# Allegro board Balang_Ctrl_V1_0_20190623.brd
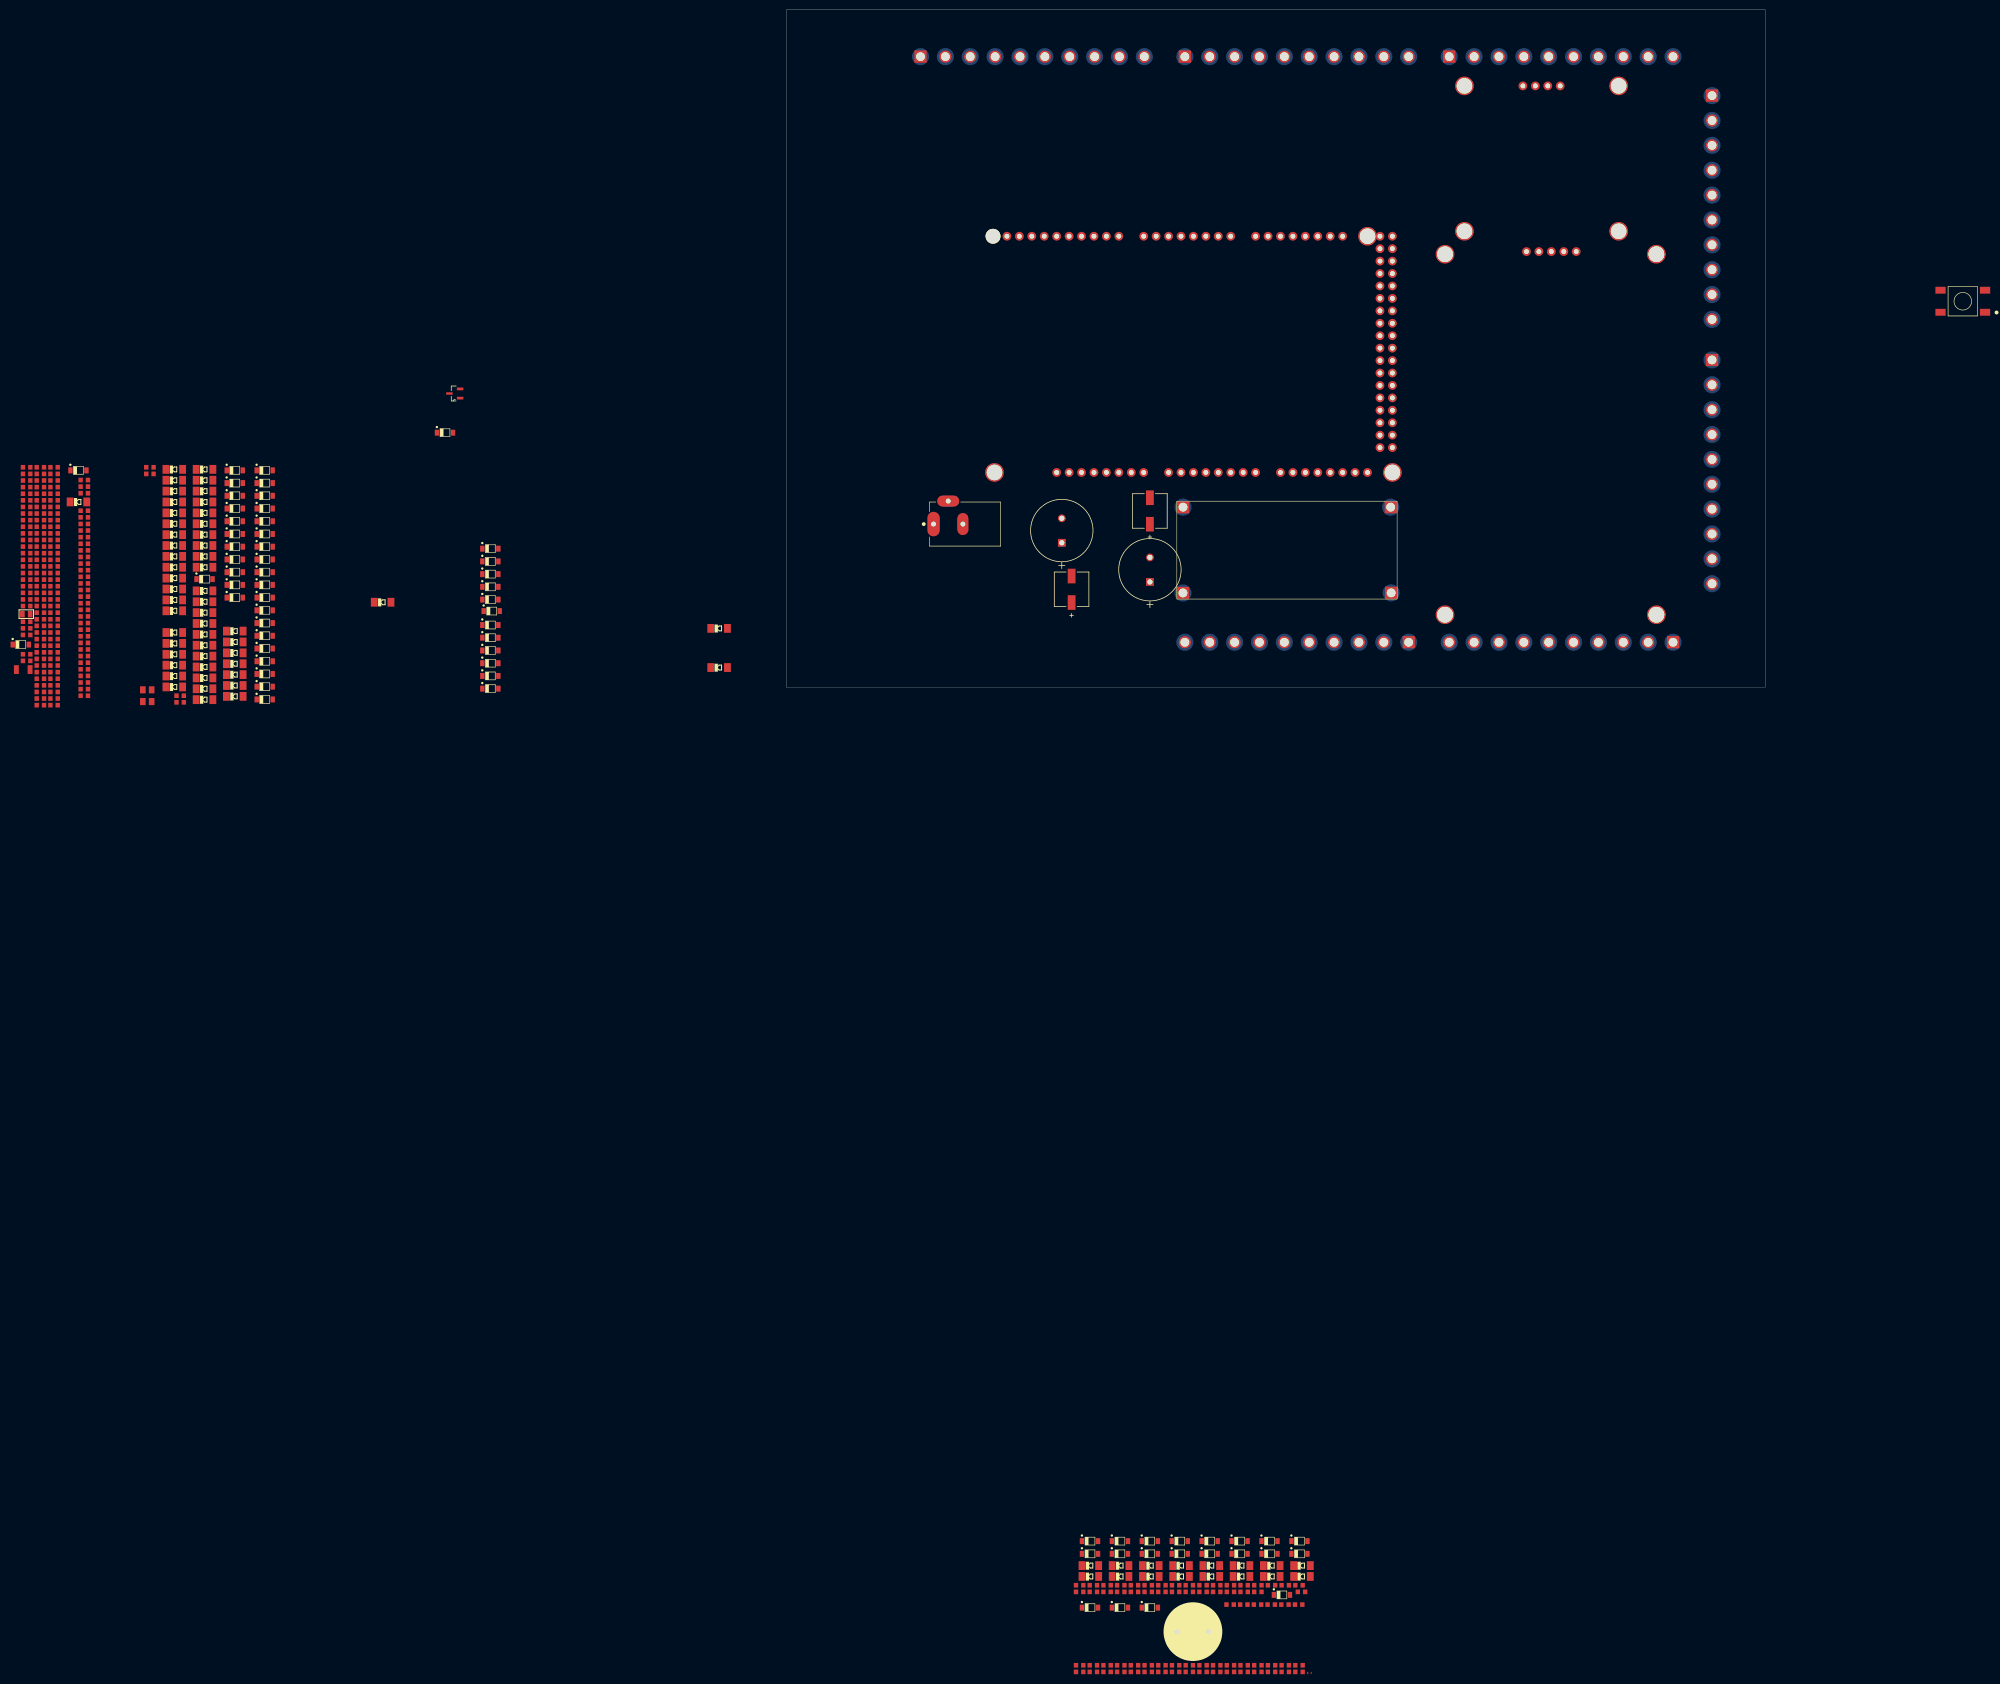
[diagram p0: board, top side]
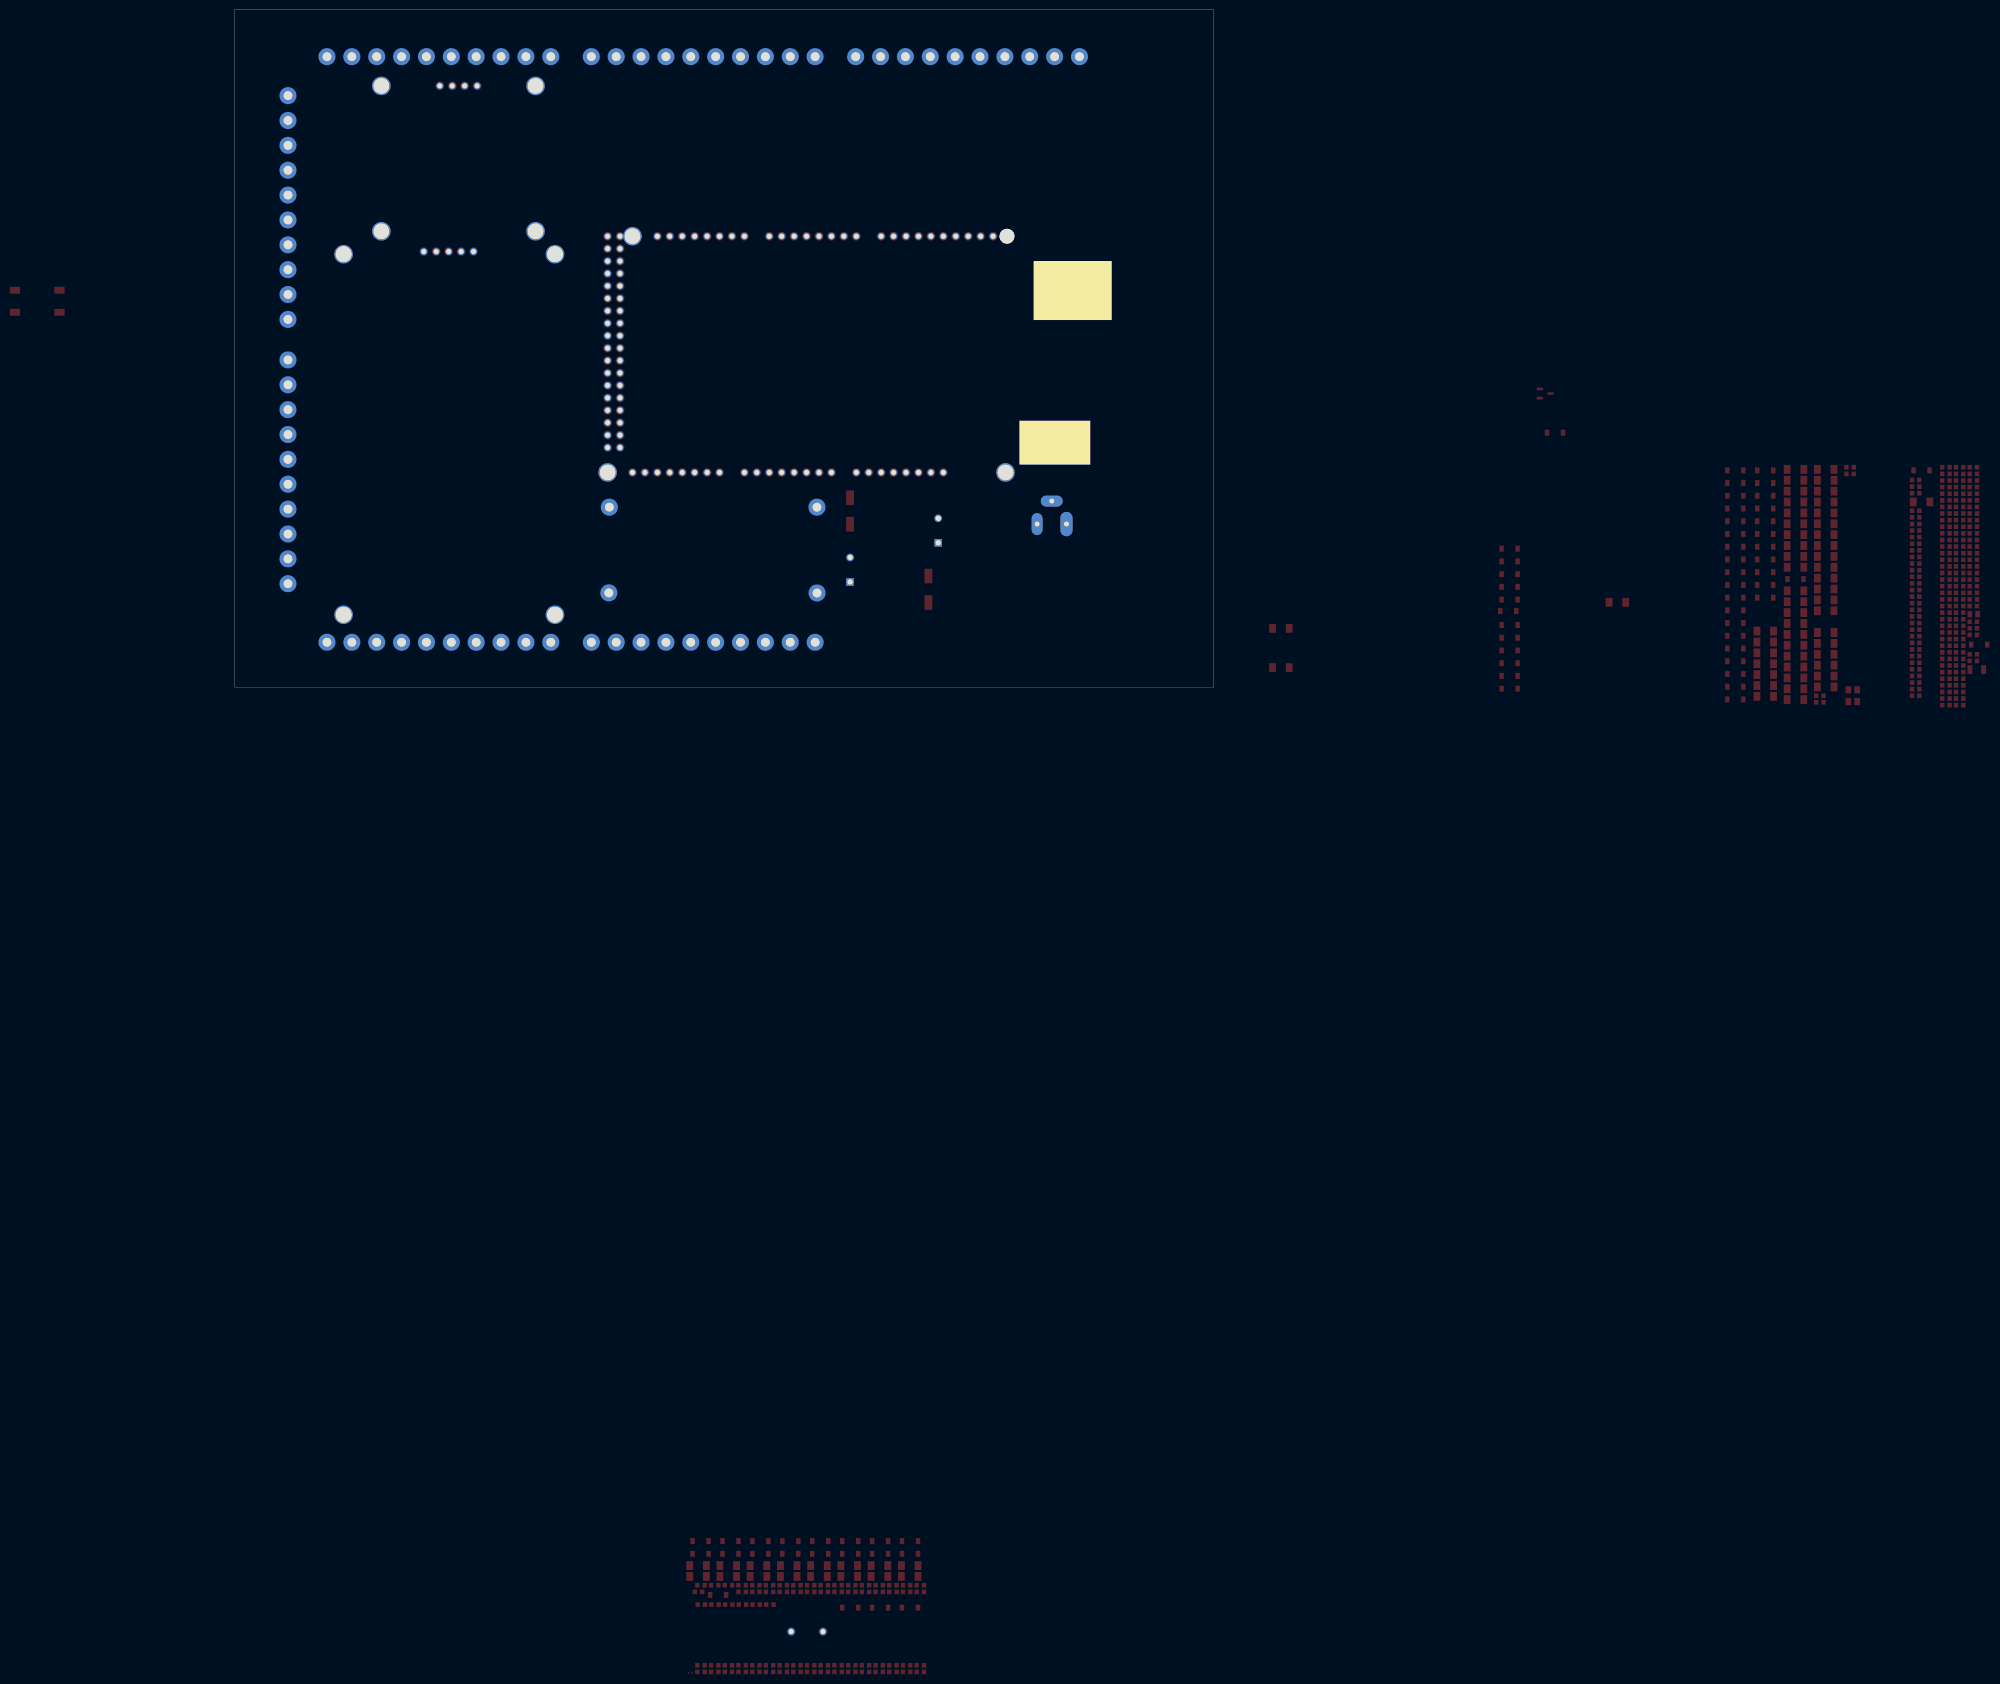
[diagram p1: board, bottom side, seen from below]

Outline 200 x 138.4 mm; copper layers: TOP, BOTTOM. Coordinates in mm from the lower left corner of the outline.
Outline path: 0,138.4 0,0 200,0 200,138.4 0,138.4

## Placement (name value [footprint] x y rotation side)
C1  100n  [CC0603]  -123.79 -1.74 0 top
C2  100n  [CC0603]  90.75 -183.49 0 top
C3  100n  [CC0603]  93.55 -183.49 0 top
C4  100n  [CC0603]  96.35 -183.49 0 top
C5  100n  [CC0603]  99.15 -183.49 0 top
C6  100n  [CC0603]  101.95 -183.49 0 top
C7  100n  [CC0603]  104.75 -183.49 0 top
C8  100n  [CC0603]  -129.97 44.92 0 top
C9  100n  [CC0603]  -129.97 43.58 0 top
C10  100n  [CC0603]  68.35 -183.49 0 top
C11  100n  [CC0603]  71.15 -183.49 0 top
C12  100n  [CC0603]  73.95 -183.49 0 top
C13  100n  [CC0603]  76.75 -183.49 0 top
C14  100n  [CC0603]  79.55 -183.49 0 top
C15  100n  [CC0603]  82.35 -183.49 0 top
C16  100n  [CC0603]  85.15 -183.49 0 top
C17  100n  [CC0603]  87.95 -183.49 0 top
C18  100n  [CC0603]  -123.79 -3.09 0 top
C19  100n  [CC0603]  59.95 -183.49 0 top
C20  1000uF  [U1-Z]  74.3 21.5 90 top
C21  1000uF  [U1-Z]  56.3 29.5 90 top
C22  100uF  [PCAP_6P3X7P7-ELECT]  74.3 36 90 top
C23  100uF  [PCAP_6P3X7P7-ELECT]  58.3 20 90 top
C24  10uF  [CC0805]  -130.52 -0.54 0 top
C25  10uF  [CC0805]  -130.52 -2.94 0 top
C26  100n  [CC0603]  62.75 -183.49 0 top
C27  100n  [CC0603]  65.55 -183.49 0 top
C28  100n  [CC0603]  59.95 -184.84 0 top
C29  100n  [CC0603]  62.75 -184.84 0 top
C30  100n  [CC0603]  65.55 -184.84 0 top
C32  100n  [CC0603]  68.35 -184.84 0 top
C33  100n  [CC0603]  71.15 -184.84 0 top
C34  100n  [CC0603]  73.95 -184.84 0 top
C35  100n  [CC0603]  76.75 -184.84 0 top
C36  100n  [CC0603]  79.55 -184.84 0 top
C37  100n  [CC0603]  82.35 -184.84 0 top
C38  100n  [CC0603]  85.15 -184.84 0 top
C39  100n  [CC0603]  87.95 -184.84 0 top
C40  100n  [CC0603]  90.75 -184.84 0 top
C41  100n  [CC0603]  93.55 -184.84 0 top
C42  100n  [CC0603]  96.35 -184.84 0 top
C43  100n  [CC0603]  -155.15 6.72 0 top
C44  100n  [CC0603]  -155.15 5.38 0 top
C45  100n  [CC0603]  105.26 -184.84 0 top
C46  100n  [CC0603]  -143.38 42.33 0 top
C47  100n  [CC0603]  -143.38 40.98 0 top
C48  100n  [CC0603]  -143.38 39.62 0 top
C49  100n  [CC0603]  90.68 -187.44 0 top
C50  100n  [CC0603]  -143.38 36.05 0 top
C51  100n  [CC0603]  -143.38 34.7 0 top
C52  100n  [CC0603]  -143.38 33.35 0 top
C53  100n  [CC0603]  -143.38 32 0 top
C54  100n  [CC0603]  -143.38 30.65 0 top
C55  100n  [CC0603]  -143.38 29.3 0 top
C56  100n  [CC0603]  -143.38 27.95 0 top
C57  100n  [CC0603]  -143.38 26.6 0 top
C58  100n  [CC0603]  -143.38 25.25 0 top
C59  100n  [CC0603]  -143.38 23.9 0 top
C60  100n  [CC0603]  -143.38 22.55 0 top
C61  100n  [CC0603]  -143.38 21.2 0 top
C62  100n  [CC0603]  -143.38 19.85 0 top
C63  100n  [CC0603]  -143.38 18.5 0 top
C64  100n  [CC0603]  -143.38 17.15 0 top
C65  100n  [CC0603]  -143.38 15.8 0 top
C66  100n  [CC0603]  -143.38 14.45 0 top
C67  100n  [CC0603]  -143.38 13.1 0 top
C68  100n  [CC0603]  -143.38 11.75 0 top
C69  100n  [CC0603]  -143.38 10.4 0 top
C70  100n  [CC0603]  -143.38 9.05 0 top
C71  100n  [CC0603]  -143.38 7.7 0 top
C72  100n  [CC0603]  -143.38 6.35 0 top
C73  100n  [CC0603]  -143.38 5 0 top
C74  100n  [CC0603]  -143.38 3.65 0 top
C75  100n  [CC0603]  -143.38 2.3 0 top
C76  100n  [CC0603]  -143.38 0.95 0 top
C77  100n  [CC0603]  -143.38 -0.4 0 top
C78  100n  [CC0603]  -143.38 -1.75 0 top
D1  DIODE  [MINIMELF]  -13.7 12.01 0 top
D2  DIODE  [MINIMELF]  -118.82 24.5 0 top
D3  DIODE  [MINIMELF]  93.01 -181.69 0 top
D4  DIODE  [MINIMELF]  -118.82 10.79 0 top
D5  DIODE  [MINIMELF]  -118.82 -2.55 0 top
D6  DIODE  [MINIMELF]  -144.58 37.85 0 top
D7  DIODE  [MINIMELF]  -124.99 37.83 0 top
D8  DIODE  [MINIMELF]  -124.99 24.5 0 top
D9  DIODE  [MINIMELF]  -124.99 11.17 0 top
D10  DIODE  [MINIMELF]  -112.64 11.46 0 top
D11  DIODE  [MINIMELF]  -112.64 -1.88 0 top
D12  DIODE  [MINIMELF]  86.83 -179.47 0 top
D13  DIODE  [MINIMELF]  -118.82 42.28 0 top
D14  DIODE  [MINIMELF]  -118.82 31.17 0 top
D15  DIODE  [MINIMELF]  -118.82 28.94 0 top
D16  DIODE  [MINIMELF]  -118.82 26.72 0 top
D17  ZEN  [SOD3716X117N]  104.84 -174.47 0 top
D18  ZEN  [SOD3716X117N]  62.06 -174.47 0 top
D19  ZEN  [SOD3716X117N]  68.17 -174.47 0 top
D20  ZEN  [SOD3716X117N]  74.28 -174.47 0 top
D21  ZEN  [SOD3716X117N]  80.4 -174.47 0 top
D22  ZEN  [SOD3716X117N]  86.51 -174.47 0 top
D23  ZEN  [SOD3716X117N]  92.62 -174.47 0 top
D24  ZEN  [SOD3716X117N]  98.73 -174.47 0 top
D25  ZEN  [SOD3716X117N]  -106.53 33.9 0 top
D26  ZEN  [SOD3716X117N]  -106.53 44.3 0 top
D27  ZEN  [SOD3716X117N]  -106.53 41.7 0 top
D28  ZEN  [SOD3716X117N]  -106.53 39.1 0 top
D29  ZEN  [SOD3716X117N]  -106.53 36.5 0 top
D30  ZEN  [SOD3716X117N]  74.28 -177.07 0 top
D31  ZEN  [SOD3716X117N]  -106.53 31.3 0 top
D32  ZEN  [SOD3716X117N]  -106.53 28.7 0 top
D33  DIODE 34/DD  [MINIMELF]  -82.44 17.35 0 top
D34  DIODE  [MINIMELF]  -118.82 19.68 0 top
D35  DIODE  [MINIMELF]  -118.82 17.45 0 top
D36  ZEN  [SOD3716X117N]  -106.53 26.1 0 top
D37  DIODE  [MINIMELF]  -118.82 15.23 0 top
D38  ZEN  [SOD3716X117N]  -106.53 23.5 0 top
D39  DIODE  [MINIMELF]  -118.82 13.01 0 top
D40  ZEN  [SOD3716X117N]  -106.53 20.9 0 top
D42  DIODE  [MINIMELF]  -118.82 8.57 0 top
D43  DIODE  [MINIMELF]  -118.82 6.34 0 top
D44  DIODE  [MINIMELF]  -118.82 4.12 0 top
D45  DIODE  [MINIMELF]  -118.82 1.9 0 top
D46  ZEN  [SOD3716X117N]  -106.53 18.3 0 top
D47  DIODE  [MINIMELF]  -118.82 -0.32 0 top
D48  ZEN  [SOD3716X117N]  -106.53 15.7 0 top
D49  ZEN  [SOD3716X117N]  -106.53 13.1 0 top
D50  ZEN  [SOD3716X117N]  -106.53 10.5 0 top
D51  ZEN  [SOD3716X117N]  -106.53 7.9 0 top
D52  DIODE  [MINIMELF]  62.13 -181.69 0 top
D53  DIODE  [MINIMELF]  68.3 -181.69 0 top
D54  DIODE  [MINIMELF]  74.48 -181.69 0 top
D55  DIODE  [MINIMELF]  80.66 -181.69 0 top
D56  ZEN  [SOD3716X117N]  -106.53 5.3 0 top
D57  DIODE  [MINIMELF]  86.83 -181.69 0 top
D58  ZEN  [SOD3716X117N]  -106.53 2.7 0 top
D59  ZEN  [SOD3716X117N]  -106.53 0.1 0 top
D60  ZEN  [SOD3716X117N]  -106.53 -2.5 0 top
D61  ZEN  [SOD3716X117N]  62.06 -177.07 0 top
D62  DIODE  [MINIMELF]  99.18 -181.69 0 top
D63  DIODE  [MINIMELF]  105.36 -181.69 0 top
D64  DIODE  [MINIMELF]  -124.99 44.5 0 top
D65  DIODE  [MINIMELF]  -124.99 42.28 0 top
D66  ZEN  [SOD3716X117N]  68.17 -177.07 0 top
D67  DIODE  [MINIMELF]  -124.99 40.06 0 top
D68  ZEN  [SOD3716X117N]  -112.64 36.5 0 top
D69  ZEN  [SOD3716X117N]  80.4 -177.07 0 top
D70  ZEN  [SOD3716X117N]  86.51 -177.07 0 top
D71  ZEN  [SOD3716X117N]  92.62 -177.07 0 top
D72  DIODE  [MINIMELF]  -124.99 35.61 0 top
D73  DIODE  [MINIMELF]  -124.99 33.39 0 top
D74  DIODE  [MINIMELF]  -124.99 31.17 0 top
D75  DIODE  [MINIMELF]  -124.99 28.94 0 top
D76  ZEN  [SOD3716X117N]  98.73 -177.07 0 top
D77  DIODE  [MINIMELF]  -124.99 26.72 0 top
D78  ZEN  [SOD3716X117N]  104.84 -177.07 0 top
D79  ZEN  [SOD3716X117N]  -112.64 44.3 0 top
D80  ZEN  [SOD3716X117N]  -112.64 41.7 0 top
D81  ZEN  [SOD3716X117N]  -112.64 39.1 0 top
D82  DIODE  [MINIMELF]  -124.99 22.28 0 top
D83  DIODE  [MINIMELF]  -124.99 20.05 0 top
D84  DIODE  [MINIMELF]  -124.99 17.83 0 top
D85  DIODE  [MINIMELF]  -124.99 15.61 0 top
D86  ZEN  [SOD3716X117N]  -118.82 22.08 0 top
D87  DIODE  [MINIMELF]  -13.7 4.01 0 top
D88  ZEN  [SOD3716X117N]  -112.64 33.9 0 top
D89  ZEN  [SOD3716X117N]  -112.64 31.3 0 top
D90  ZEN  [SOD3716X117N]  -112.64 28.7 0 top
D91  ZEN  [SOD3716X117N]  -112.64 26.1 0 top
D92  DIODE  [MINIMELF]  -124.99 8.94 0 top
D93  DIODE  [MINIMELF]  -124.99 6.72 0 top
D94  DIODE  [MINIMELF]  -124.99 4.5 0 top
D95  DIODE  [MINIMELF]  -124.99 2.28 0 top
D96  ZEN  [SOD3716X117N]  -112.64 23.5 0 top
D97  DIODE  [MINIMELF]  -124.99 0.05 0 top
D98  ZEN  [SOD3716X117N]  -112.64 20.9 0 top
D99  ZEN  [SOD3716X117N]  -112.64 18.3 0 top
D100  ZEN  [SOD3716X117N]  -156.35 8.7 0 top
D101  ZEN  [SOD3716X117N]  74.28 -188.06 0 top
D102  DIODE  [MINIMELF]  -112.64 9.23 0 top
D103  DIODE  [MINIMELF]  -112.64 7.01 0 top
D104  DIODE  [MINIMELF]  -112.64 4.79 0 top
D105  DIODE  [MINIMELF]  -112.64 2.57 0 top
D106  ZEN  [SOD3716X117N]  68.17 -188.06 0 top
D107  DIODE  [MINIMELF]  -112.64 0.34 0 top
D108  ZEN  [SOD3716X117N]  62.06 -188.06 0 top
D109  ZEN  [SOD3716X117N]  -144.58 44.3 0 top
D110  ZEN  [SOD3716X117N]  101.26 -185.46 0 top
D111  ZEN  [SOD3716X117N]  -60.43 20.5 0 top
D113  DIODE  [MINIMELF]  62.13 -179.47 0 top
D114  DIODE  [MINIMELF]  68.3 -179.47 0 top
D115  DIODE  [MINIMELF]  74.48 -179.47 0 top
D116  DIODE  [MINIMELF]  80.66 -179.47 0 top
D117  ZEN  [SOD3716X117N]  -60.43 28.3 0 top
D118  ZEN  [SOD3716X117N]  -60.43 25.7 0 top
D119  ZEN  [SOD3716X117N]  -69.7 52 0 top
D120  ZEN  [SOD3716X117N]  -60.43 23.1 0 top
D121  DIODE  [MINIMELF]  93.01 -179.47 0 top
D122  DIODE  [MINIMELF]  99.18 -179.47 0 top
D123  DIODE  [MINIMELF]  105.36 -179.47 0 top
D125  DIODE  [MINIMELF]  -118.82 44.5 0 top
D126  ZEN  [SOD3716X117N]  -60.43 17.9 0 top
D127  ZEN  [SOD3716X117N]  -60.43 7.5 0 top
D128  ZEN  [SOD3716X117N]  -60.15 15.55 0 top
D129  ZEN  [SOD3716X117N]  -60.43 12.7 0 top
D130  DIODE  [MINIMELF]  -118.82 40.06 0 top
D131  DIODE  [MINIMELF]  -118.82 37.83 0 top
D132  DIODE  [MINIMELF]  -118.82 35.61 0 top
D133  DIODE  [MINIMELF]  -118.82 33.39 0 top
D134  ZEN  [SOD3716X117N]  -60.43 10.1 0 top
D135  ZEN  [SOD3716X117N]  -60.43 -0.3 0 top
D136  ZEN  [SOD3716X117N]  -60.43 4.9 0 top
D137  ZEN  [SOD3716X117N]  -60.43 2.3 0 top
F2  1206L012WR  [FUSER_1206L012WR]  -155.85 3.6 0 top
J1  TerminalBlock  [TERMINALBLOCK508]  120.2 128.82 0 top
J2  TerminalBlock  [TERMINALBLOCK508]  12.2 128.82 0 top
J3  Rst  [SW_5-1437565-0]  240.35 78.85 180 top
J4  TerminalBlock  [TERMINALBLOCK508]  66.2 128.82 0 top
J5  TerminalBlock  [TERMINALBLOCK508]  142.4 9.18 180 top
J6  TerminalBlock  [TERMINALBLOCK508]  189.12 136.1 270 top
J7  TerminalBlock  [TERMINALBLOCK508]  189.12 82.1 270 top
J8  TerminalBlock  [TERMINALBLOCK508]  196.4 9.18 180 top
K1  CAP_KeyPad  [CAP_KEYPAD]  180.3 91 180 top
L1  OLED  [OLED_1_3INCH]  136.55 91.15 0 top
LS1  BUZZER  [BUZZER5V]  79.83 -192.96 0 top
NOREF  -  []  -170.85 -198.6 0 top
Q1  IRF150  [SOT95P237X112-3N]  -67.7 60 180 top
R1  100k  [RC0603]  93.48 -187.44 0 top
R2  100k  [RC0603]  -149.55 24.68 0 top
R3  1k  [RC0603]  -152.35 17.93 0 top
R4  1k  [RC0603]  -152.35 15.23 0 top
R5  1k  [RC0603]  -152.35 11.18 0 top
R6  1k  [RC0603]  -152.35 3.08 0 top
R7  1k  [RC0603]  59.95 -201.19 0 top
R8  1k  [RC0603]  76.75 -201.19 0 top
R9  1k  [RC0603]  96.35 -201.19 0 top
R10  1k  [RC0603]  76.75 -199.84 0 top
R11  1k  [RC0603]  93.55 -199.84 0 top
R12  1k  [RC0603]  -152.35 43.58 0 top
R13  1k  [RC0603]  -152.35 35.48 0 top
R14  1k  [RC0603]  -152.35 26.02 0 top
R15  1k  [RC0603]  -152.35 23.32 0 top
R16  1k  [RC0603]  -152.35 21.98 0 top
R17  1k  [RC0603]  -152.35 20.62 0 top
R18  1k  [RC0603]  -152.35 19.27 0 top
R19  R  [RC0603]  -155.15 43.58 0 top
R20  R  [RC0603]  -155.15 42.23 0 top
R21  R  [RC0603]  -155.15 40.88 0 top
R22  R  [RC0603]  -155.15 39.52 0 top
R23  R  [RC0603]  -155.15 38.17 0 top
R24  R  [RC0603]  -155.15 36.83 0 top
R25  R  [RC0603]  -155.15 35.48 0 top
R26  R  [RC0603]  -155.15 34.12 0 top
R27  R  [RC0603]  -155.15 32.77 0 top
R28  R  [RC0603]  -155.15 31.42 0 top
R29  R  [RC0603]  -155.15 30.08 0 top
R30  R  [RC0603]  -155.15 28.73 0 top
R31  R  [RC0603]  -155.15 27.38 0 top
R32  R  [RC0603]  -155.15 26.02 0 top
R33  R  [RC0603]  -155.15 24.68 0 top
R34  R  [RC0603]  -155.15 23.32 0 top
R35  10R  [RC0805]  -155.23 14.93 0 top
R36  10k  [RC0603]  -155.15 13.38 0 top
R37  R  [RC0603]  -155.15 21.98 0 top
R38  1k  [RC0603]  -152.35 16.57 0 top
R39  10k  [RC0603]  -155.15 12.02 0 top
R40  10k  [RC0603]  -155.15 10.68 0 top
R41  100k  [RC0603]  -149.55 23.32 0 top
R42  1k  [RC0603]  -152.35 13.88 0 top
R43  100k  [RC0603]  -149.55 21.98 0 top
R44  1k  [RC0603]  -152.35 12.52 0 top
R46  R  [RC0603]  -155.15 20.62 0 top
R47  R  [RC0603]  -155.15 19.27 0 top
R48  R  [RC0603]  -155.15 17.93 0 top
R49  R  [RC0603]  -155.15 16.57 0 top
R50  1k  [RC0603]  -152.35 9.82 0 top
R51  100k  [RC0603]  -149.55 20.62 0 top
R52  1k  [RC0603]  -152.35 8.47 0 top
R53  1k  [RC0603]  -152.35 7.12 0 top
R54  1k  [RC0603]  -152.35 5.78 0 top
R55  1k  [RC0603]  -152.35 4.43 0 top
R56  100k  [RC0603]  -149.55 19.27 0 top
R57  100k  [RC0603]  -149.55 17.93 0 top
R58  100k  [RC0603]  -149.55 16.57 0 top
R59  100k  [RC0603]  -149.55 15.23 0 top
R60  1k  [RC0603]  -152.35 1.72 0 top
R61  100k  [RC0603]  -149.55 13.88 0 top
R62  1k  [RC0603]  -152.35 0.38 0 top
R63  1k  [RC0603]  -152.35 -0.98 0 top
R64  1k  [RC0603]  -152.35 -2.33 0 top
R65  1k  [RC0603]  -152.35 -3.67 0 top
R66  100k  [RC0603]  -149.55 12.52 0 top
R67  100k  [RC0603]  -149.55 11.18 0 top
R68  100k  [RC0603]  -149.55 9.82 0 top
R69  100k  [RC0603]  -149.55 8.47 0 top
R70  1k  [RC0603]  62.75 -201.19 0 top
R71  100k  [RC0603]  -149.55 7.12 0 top
R72  1k  [RC0603]  65.55 -201.19 0 top
R73  1k  [RC0603]  68.35 -201.19 0 top
R74  1k  [RC0603]  71.15 -201.19 0 top
R75  1k  [RC0603]  73.95 -201.19 0 top
R76  100k  [RC0603]  -149.55 5.78 0 top
R77  100k  [RC0603]  -149.55 4.43 0 top
R78  100k  [RC0603]  -149.55 3.08 0 top
R79  100k  [RC0603]  -149.55 1.72 0 top
R80  1k  [RC0603]  79.55 -201.19 0 top
R81  100k  [RC0603]  -149.55 0.38 0 top
R82  1k  [RC0603]  82.35 -201.19 0 top
R83  1k  [RC0603]  85.15 -201.19 0 top
R84  1k  [RC0603]  87.95 -201.19 0 top
R85  1k  [RC0603]  90.75 -201.19 0 top
R86  100k  [RC0603]  -149.55 -0.98 0 top
R87  1k  [RC0603]  93.55 -201.19 0 top
R88  100k  [RC0603]  -149.55 -2.33 0 top
R89  100k  [RC0603]  -149.55 -3.67 0 top
R90  1k  [RC0603]  99.15 -201.19 0 top
R91  100k  [RC0603]  59.95 -199.84 0 top
R92  100k  [RC0603]  62.75 -199.84 0 top
R93  1k  [RC0603]  101.95 -201.19 0 top
R94  1k  [RC0603]  104.75 -201.19 0 top
R95  1k  [RC0603]  -155.15 44.92 0 top
R96  100k  [RC0603]  65.55 -199.84 0 top
R97  100k  [RC0603]  68.35 -199.84 0 top
R98  100k  [RC0603]  71.15 -199.84 0 top
R99  100k  [RC0603]  73.95 -199.84 0 top
R100  1k  [RC0603]  79.55 -199.84 0 top
R101  100k  [RC0603]  96.28 -187.44 0 top
R102  1k  [RC0603]  82.35 -199.84 0 top
R103  1k  [RC0603]  85.15 -199.84 0 top
R104  1k  [RC0603]  87.95 -199.84 0 top
R105  1k  [RC0603]  90.75 -199.84 0 top
R106  100k  [RC0603]  99.08 -187.44 0 top
R107  100k  [RC0603]  101.88 -187.44 0 top
R108  100k  [RC0603]  104.68 -187.44 0 top
R109  100k  [RC0603]  -149.55 44.92 0 top
R110  1k  [RC0603]  96.35 -199.84 0 top
R111  100k  [RC0603]  -149.55 43.58 0 top
R112  1k  [RC0603]  99.15 -199.84 0 top
R113  1k  [RC0603]  101.95 -199.84 0 top
R114  1k  [RC0603]  104.75 -199.84 0 top
R115  1k  [RC0603]  -152.35 44.92 0 top
R117  100k  [RC0603]  -149.55 42.23 0 top
R118  100k  [RC0603]  -149.55 40.88 0 top
R119  100k  [RC0603]  -149.55 39.52 0 top
R120  100k  [RC0603]  -149.55 38.17 0 top
R121  1k  [RC0603]  -152.35 42.23 0 top
R122  1k  [RC0603]  -152.35 40.88 0 top
R123  1k  [RC0603]  -152.35 39.52 0 top
R124  1k  [RC0603]  -152.35 38.17 0 top
R125  100k  [RC0603]  -149.55 36.83 0 top
R126  100k  [RC0603]  -149.55 35.48 0 top
R127  100k  [RC0603]  -149.55 34.12 0 top
R128  100k  [RC0603]  -149.55 32.77 0 top
R129  1k  [RC0603]  -152.35 36.83 0 top
R130  1k  [RC0603]  -152.35 34.12 0 top
R131  1k  [RC0603]  -152.35 32.77 0 top
R132  1k  [RC0603]  -152.35 31.42 0 top
R133  100k  [RC0603]  -149.55 31.42 0 top
R134  100k  [RC0603]  -149.55 30.08 0 top
R135  100k  [RC0603]  -149.55 28.73 0 top
R136  100k  [RC0603]  -149.55 27.38 0 top
R137  1k  [RC0603]  -152.35 30.08 0 top
R138  1k  [RC0603]  -152.35 28.73 0 top
R139  1k  [RC0603]  -152.35 27.38 0 top
R140  1k  [RC0603]  -152.35 24.68 0 top
R141  100k  [RC0603]  -149.55 26.02 0 top
U1  Atmega2560  [ATMEGA2560_1]  27.31 41.33 0 top
U2  Power_Supply_Con  [CUI_PJ-035D]  30.1 33.33 0 top
U3  LM2596  [LM2596_MODULE]  79.8 18 0 top
V2  SPARK GAP  [SPARK_GAP]  106.88 -201.41 0 top

## Library data of the parts
C1 C18 C19 C26 C27 = CAP NP_0
C2-C17 = C_0
C20-C25 = CAP
C28-C30 C32-C78 = CAP NP
D1-D16 D34 D35 D37 D39 D42-D45 D47 D52-D55 D57 D62-D65 D67 D72-D75 D77 D82-D85 D87 D92-D95 D97 D102-D105 D107 D113-D116 D121-D123 D125 D130-D133 = DIODE_6
D17-D32 D36 D38 D40 D46 D48-D51 D56 D58-D61 D66 D68-D71 D76 D78-D81 D86 D88-D91 D96 D98-D101 D106 D108-D111 D117-D120 D126-D129 D134-D137 = ZENER_AK_6
D33 = DIODE 34/DD_0
F2 = FUSE
J1 J2 J4-J8 = Terminal_Block_0
J3 = Rst
K1 = Cap_KeyPad
L1 = OLED_Module
LS1 = BUZZER
Q1 = BUZ84A
R1-R44 R46-R115 R117-R141 = R
U1 = Atmega2560_Shield_1
U2 = Power_Supply_Con
U3 = LM2596_Module
V2 = SPARK GAP

## Footprints (pads in the part's own frame, mm; a bottom-side part is the same pattern mirrored in y, then rotated)
ATMEGA2560_1
  round 3.023 hole 3.023 unplated: (14.94,50.8)
  round 3.81 hole 3.2 unplated: (15.24,2.54) (91.44,50.8) (96.52,2.54)
  round 1.8 hole 1: 1(60.96,50.8) 2(58.42,50.8) 3(55.88,50.8) 4(53.34,50.8) 5(50.8,50.8) 6(48.26,50.8) 7(45.72,50.8) 8(40.64,50.8) 9(38.1,50.8) 10(35.56,50.8) 11(33.02,50.8) 12(30.48,50.8) 13(27.94,50.8) 14(68.58,50.8) 15(71.12,50.8) 16(73.66,50.8) 17(76.2,50.8) 18(78.74,50.8) 19(81.28,50.8) 20(83.82,50.8) 21(86.36,50.8) 22(93.98,48.26) 23(96.52,48.26) 24(93.98,45.72) 25(96.52,45.72) 26(93.98,43.18) 27(96.52,43.18) 28(93.98,40.64) 29(96.52,40.64) 30(93.98,38.1) 31(96.52,38.1) 32(93.98,35.56) 33(96.52,35.56) 34(93.98,33.02) 35(96.52,33.02) 36(93.98,30.48) 37(96.52,30.48) 38(93.98,27.94) 39(96.52,27.94) 40(93.98,25.4) 41(96.52,25.4) 42(93.98,22.86) 43(96.52,22.86) 44(93.98,20.32) 45(96.52,20.32) 46(93.98,17.78) 47(96.52,17.78) 48(93.98,15.24) 49(96.52,15.24) 50(93.98,12.7) 51(96.52,12.7) 52(93.98,10.16) 53(96.52,10.16) 54(50.8,2.54) 55(53.34,2.54) 56(55.88,2.54) 57(58.42,2.54) 58(60.96,2.54) 59(63.5,2.54) 60(66.04,2.54) 61(68.58,2.54) 62(73.66,2.54) 63(76.2,2.54) 64(78.74,2.54) 65(81.28,2.54) 66(83.82,2.54) 67(86.36,2.54) 68(88.9,2.54) 69(91.44,2.54) 70(27.94,2.54) 71(30.48,2.54) 72(33.02,2.54) 73(35.56,2.54) 74(38.1,2.54) 75(40.64,2.54) 76(43.18,2.54) 77(45.72,2.54) 78(25.4,50.8) 79(22.86,50.8) 80(20.32,50.8) 81(17.78,50.8) 82(93.98,50.8) 83(96.52,50.8) 84(93.98,7.62) 85(96.52,7.62) 86(63.5,50.8)
BUZZER5V
  round 1.8 hole 1: 1(0,0) 2(6.5,0)
CAP_KEYPAD
  round 3.81 hole 3.2 unplated: (2.54,76.2) (2.54,2.54) (45.72,76.2) (45.72,2.54)
  round 1.8 hole 1: 1(29.08,2) 2(26.54,2) 3(24,2) 4(21.46,2) 5(18.92,2)
CC0603
  rect 0.9x0.95 smd: 1(-0.75,0) 2(0.75,0)
CC0805
  rect 1.15x1.45 smd: 1(-0.9,0) 2(0.9,0)
CUI_PJ-035D
  oval 2.5x5 hole 1: 1(0,0)
  oval 2.25x4.5 hole 1: 2(6,0)
  oval 4.5x2.25 hole 1: 3(3,4.7)
FUSER_1206L012WR
  rect 1x1.8 smd: 1(-1.4,0) 2(1.4,0)
LM2596_MODULE
  rect 2.5x2.5 hole 1.8: 1(1.27,18.78) 2(1.25,1.25) 3(43.78,1.27) 4(43.68,18.78)
MINIMELF
  rect 1.4x1.8 smd: A(1.7,0) C(-1.7,0)
OLED_1_3INCH
  round 3.81 hole 3.2 unplated: (2,31.7) (2,2) (33.5,31.7) (33.5,2)
  round 1.8 hole 1: 1(13.94,31.7) 2(16.48,31.7) 3(19.02,31.7) 4(21.56,31.7)
PCAP_6P3X7P7-ELECT
  rect 2.997x1.6 smd: 1(-2.705,0) 2(2.705,0)
RC0603
  rect 0.9x0.95 smd: 1(-0.75,0) 2(0.75,0)
RC0805
  rect 0.95x1.35 smd: 1(-0.8,0) 2(0.8,0)
SOD3716X117N
  rect 0.91x1.22 smd: A(1.635,0) C(-1.635,0)
SOT95P237X112-3N
  rect 1.321x0.559 smd: 1(-1.092,0.94) 2(-1.092,-0.94)
  rect 1.321x0.508 smd: 3(1.092,0)
SPARK_GAP
  custom 0.4x0.4 smd: 1(-0.305,0) 2(0.305,0)
SW_5-1437565-0
  rect 2.1x1.4 smd: 1(-4.55,2.25) 2(4.55,2.25) 3(-4.55,-2.25) 4(4.55,-2.25)
TERMINALBLOCK508
  rect 2.5x2.5 hole 1.8: 1(15.24,0)
  round 2.5 hole 1.8: 2(20.32,0) 3(25.4,0) 4(30.48,0) 5(35.56,0) 6(40.64,0) 7(45.72,0) 8(50.8,0) 9(55.88,0) 10(60.96,0)
U1-Z
  rect 1.575x1.575 hole 1.067: 1(0,0)
  round 1.575 hole 1.067: 2(5.004,0)

## Nets
5V: C18.1 C19.1 D34.C(K) K1.1(VCC) L1.1(VCC) R1.1 R2.1 R35.2 R36.2 R39.2 R141.2 U1.74(5V) U1.82(5V_2) U1.83(5V_1)
GND: C1.2 C8.2 C9.2 C10.2 C11.2 C18.2 C19.2 C20.2 C21.2 C22.2 C23.2 C24.2 C25.2 C26.2 C27.2 C28.1 C28.2 C29.2 C30.2 C32.2 C33.2 C34.2 C35.2 C36.2 C37.2 C38.2 C39.2 C40.2 C41.2 C42.2 C43.2 C44.2 C45.2 C46.2 C47.2 C48.2 C49.2 C50.2 C51.2 C52.2 C53.2 C54.2 C55.2 C56.2 C57.2 C58.2 C59.2 C60.2 C61.2 C62.2 C63.2 C64.2 C65.2 C66.2 C67.2 C68.2 C69.2 C70.2 C71.2 C72.2 C73.2 C74.2 C75.2 C76.2 C77.2 C78.2 D23.A(ANODE) D24.A(ANODE) D25.A(ANODE) D26.A(ANODE) D36.A(ANODE) D36.C(CATHODE) D38.A(ANODE) D40.A(ANODE) D46.A(ANODE) D48.A(ANODE) D49.A(ANODE) D50.A(ANODE) D51.A(ANODE) D56.A(ANODE) D58.A(ANODE) D59.A(ANODE) D60.A(ANODE) D61.A(ANODE) D66.A(ANODE) D68.A(ANODE) D69.A(ANODE) D70.A(ANODE) D71.A(ANODE) D76.A(ANODE) D78.A(ANODE) D79.A(ANODE) D80.A(ANODE) D81.A(ANODE) D86.A(ANODE) D88.A(ANODE) D89.A(ANODE) D90.A(ANODE) D91.A(ANODE) D96.A(ANODE) D98.A(ANODE) D99.A(ANODE) D100.A(ANODE) D101.A(ANODE) D106.A(ANODE) D108.A(ANODE) D109.A(ANODE) D110.A(ANODE) D111.A(ANODE) D117.A(ANODE) D118.A(ANODE) D119.A(ANODE) D120.A(ANODE) D126.A(ANODE) D127.A(ANODE) D128.A(ANODE) D129.A(ANODE) D134.A(ANODE) D135.A(ANODE) D136.A(ANODE) D137.A(ANODE) J1.1 J1.2 J3.4 K1.5(GND) L1.2(GND) Q1.2(SOURCE) R25.1 R26.1 R27.1 R28.1 R37.1 R37.2 R38.1 R41.1 R43.1 R46.1 R47.1 R48.1 R49.1 R51.1 R56.1 R57.1 R58.1 R59.1 R61.1 R66.1 R67.1 R68.1 R69.1 R71.1 R76.1 R77.1 R78.1 R79.1 R81.1 R86.1 R88.1 R89.1 R91.1 R92.1 R96.1 R97.1 R98.1 R99.1 R101.1 R106.1 R107.1 R108.1 R109.1 R111.1 R117.1 R118.1 R119.1 R120.1 R125.1 R126.1 R127.1 R128.1 R133.1 R134.1 R135.1 R136.1 U1.13(D13) U1.70(NC) U1.75(GND_1) U1.76(GND_2) U1.78(GND_3) U1.84(GND_4) U1.85(GND_5) U2.2 U2.3 U3.2(IN_N) U3.3(OUT_N) V2.2
VCC_12V: J1.3 J1.4 U1.77(VIN)
VIN: C23.1 C24.1 C25.1 C26.1 C27.1 F2.2 U3.1(IN_P)
A0: C17.1 D32.C(CATHODE) R18.1 R34.2
A1: C16.1 D31.C(CATHODE) R17.1 R33.2
A2: C15.1 D30.C(CATHODE) R16.1 R32.2
A3: C14.1 D29.C(CATHODE) R15.1 R31.2
A4: C13.1 D28.C(CATHODE) R14.1 R30.2
A5: C12.1 D27.C(CATHODE) R13.1 R29.2
A6: C11.1 D26.C(CATHODE) R12.1 R28.2
A7: C10.1 D25.C(CATHODE) R11.1 R27.2
A8: C9.1 D24.C(CATHODE) R10.1 R26.2
A9: C8.1 D23.C(CATHODE) R9.1 R25.2
A10: C7.1 D22.C(CATHODE) R8.1 R24.2
A11: C6.1 D21.C(CATHODE) R7.1 R23.2
A12: C5.1 D20.C(CATHODE) R6.1 R22.2
A13: C4.1 D19.C(CATHODE) R5.1 R21.2
A14: C3.1 D18.C(CATHODE) R4.1 R20.2
A15: C2.1 D17.C(CATHODE) R3.1 R19.2
BUZ: R40.1 U1.3(D3)
D0: U1.86(D0/RX0)
D1: U1.1(D1/TX0)
D4: C66.1 D111.C(CATHODE) R111.2 R115.1 U1.4(D4)
D5: C61.1 D101.C(CATHODE) R101.2 R105.1 U1.5(D5)
D6: C56.1 D91.C(CATHODE) R91.2 R95.1 U1.6(D6)
D7: C51.1 D81.C(CATHODE) R81.2 R85.1 U1.7(D7)
D8: C46.1 D71.C(CATHODE) R71.2 R75.1 U1.8(D8)
D9: C41.1 D61.C(CATHODE) R61.2 R65.1 U1.9(D9)
D10: C36.1 D51.C(CATHODE) R51.2 R55.1 U1.10(D10)
D11: C30.1 D40.C(CATHODE) R43.2 R44.1 U1.11(D11)
D12: C29.1 D38.C(CATHODE) R41.2 R42.1 U1.12(D12)
D14: C75.1 D134.C(CATHODE) R133.2 R137.1 U1.14(D14)
D15: C71.1 D126.C(CATHODE) R125.2 R129.1 U1.15(D15)
D16: C67.1 D117.C(CATHODE) R117.2 R121.1 U1.16(D16)
D17: C62.1 D106.C(CATHODE) R106.2 R110.1 U1.17(D17)
D18: C57.1 D96.C(CATHODE) R96.2 R100.1 U1.18(D18)
D19: C52.1 D86.C(CATHODE) R88.2 R90.1 U1.19(D19)
D20: C47.1 D76.C(CATHODE) R76.2 R80.1 U1.20(D20)
D21: C42.1 D66.C(CATHODE) R66.2 R70.1 U1.21(D21)
D22: C37.1 D56.C(CATHODE) R56.2 R60.1 U1.22(D22)
D23: C32.1 D46.C(CATHODE) R46.2 R50.1 U1.23(D23)
D24: C77.1 D136.C(CATHODE) R135.2 R139.1 U1.24(D24)
D25: C73.1 D128.C(CATHODE) R127.2 R131.1 U1.25(D25)
D26: C69.1 D119.C(CATHODE) R119.2 R123.1 U1.26(D26)
D27: C64.1 D109.C(CATHODE) R108.2 R113.1 U1.27(D27)
D28: C59.1 D99.C(CATHODE) R98.2 R103.1 U1.28(D28)
D29: C55.1 D89.C(CATHODE) R92.2 R93.1 U1.29(D29)
D30: C49.1 D79.C(CATHODE) R78.2 R83.1 U1.30(D30)
D31: C44.1 D69.C(CATHODE) R68.2 R73.1 U1.31(D31)
D32: C39.1 D59.C(CATHODE) R58.2 R63.1 U1.32(D32)
D33: C34.1 D49.C(CATHODE) R48.2 R53.1 U1.33(D33)
D34: C78.1 D137.C(CATHODE) R136.2 R140.1 U1.34(D34)
D35: C74.1 D129.C(CATHODE) R128.2 R132.1 U1.35(D35)
D36: C70.1 D120.C(CATHODE) R120.2 R124.1 U1.36(D36)
D37: C65.1 D110.C(CATHODE) R109.2 R114.1 U1.37(D37)
D38: C60.1 D100.C(CATHODE) R99.2 R104.1 U1.38(D38)
D39: C53.1 D90.C(CATHODE) R89.2 R94.1 U1.39(D39)
D40: C50.1 D80.C(CATHODE) R79.2 R84.1 U1.40(D40)
D41: C45.1 D70.C(CATHODE) R69.2 R74.1 U1.41(D41)
D42: C40.1 D60.C(CATHODE) R59.2 R64.1 U1.42(D42)
D43: C35.1 D50.C(CATHODE) R49.2 R54.1 U1.43(D43)
D44: C76.1 D135.C(CATHODE) R134.2 R138.1 U1.44(D44)
D45: C72.1 D127.C(CATHODE) R126.2 R130.1 U1.45(D45)
D46: C68.1 D118.C(CATHODE) R118.2 R122.1 U1.46(D46)
D47: C63.1 D108.C(CATHODE) R107.2 R112.1 U1.47(D47)
D48: C58.1 D98.C(CATHODE) R97.2 R102.1 U1.48(D48)
D49: C54.1 D88.C(CATHODE) R86.2 R87.1 U1.49(D49)
D50: C48.1 D78.C(CATHODE) R77.2 R82.1 U1.50(D50)
D51: C43.1 D68.C(CATHODE) R67.2 R72.1 U1.51(D51)
D52: C38.1 D58.C(CATHODE) R57.2 R62.1 U1.52(D52)
D53: C33.1 D48.C(CATHODE) R47.2 R52.1 U1.53(D53)
D54: U1.54(D54/A0)
D55: U1.55(D55/A1)
D56: U1.56(D56/A2)
D57: U1.57(D57/A3)
D58: U1.58(D58/A4)
D59: U1.59(D59/A5)
D60: U1.60(D60/A6)
D61: U1.61(D61/A7)
D62: U1.62(D62/A8)
D63: U1.63(D63/A9)
D64: U1.64(D64/A10)
D65: U1.65(D65/A11)
D66: U1.66(D66/A12)
D67: U1.67(D67/A13)
D68: U1.68(D68/A14)
D69: U1.69(D69/A15)
IRQ: K1.2(IRQ) U1.2(D2)
SCL: K1.3(SCL) L1.3(SCL) R36.1 R39.1 U1.81(SCL)
SDA: K1.4(SDA) L1.4(SDA) U1.80(SDA)
N18485002: D43.A J5.10
N18485012: D54.A J5.9
N18485022: D63.A J5.8
N18485032: D73.A J5.7
N18485042: D84.A J5.6
N18485052: D93.A J5.5
N18485062: D103.A J5.4
N18485072: D114.A J5.3
N18485082: D122.A J5.2
N18485092: D131.A J5.1
N18490587: U1.73(3.3V)
N18490594: C1.1 J3.1 R1.2 U1.72(RESET)
N18490757: R2.2 U1.79(AREF)
N18497423: D33.A(ANODE) U2.1 V2.1
N18498799: C20.1 C21.1 C22.1 D33.C(CATHODE) F2.1
N18511942: D133.A J6.1
N18511944: D125.A J6.2
N18511946: D116.A J6.3
N18511956: D105.A J6.4
N18511958: D95.A J6.5
N18511960: D83.A J6.6
N18511962: D75.A J6.7
N18511964: D65.A J6.8
N18511966: D55.A J6.9
N18511968: D45.A J6.10
N18511970: D45.C(K) R54.2
N18511972: D55.C(K) R64.2
N18511974: D65.C(K) R74.2
N18511976: D75.C(K) R84.2
N18511978: D83.C(K) R94.2
N18511980: D95.C(K) R104.2
N18511982: D105.C(K) R114.2
N18511984: D116.C(K) R124.2
N18511986: D125.C(K) R132.2
N18511988: D133.C(K) R140.2
N18513980: D132.A J7.1
N18513982: D123.A J7.2
N18513984: D115.A J7.3
N18513994: D104.A J7.4
N18513996: D94.A J7.5
N18513998: D85.A J7.6
N18514000: D74.A J7.7
N18514002: D64.A J7.8
N18514004: D53.A J7.9
N18514006: D44.A J7.10
N18531082: D130.A J8.1
N18531084: D121.A J8.2
N18531102: D113.A J8.3
N18531104: D102.A J8.4
N18531106: D92.A J8.5
N18531108: D82.A J8.6
N18531118: D72.A J8.7
N18531120: D62.A J8.8
N18531122: D52.A J8.9
N18531124: D42.A J8.10
N18534099: D107.A J4.1
N18534101: D97.A J4.2
N18534119: D87.A J4.3
N18534121: D77.A J4.4
N18534123: D67.A J4.5
N18534125: D57.A J4.6
N18534135: D47.A J4.7
N18534137: D39.A J4.8
N18534139: D37.A J4.9
N18534141: D35.A J4.10
N18537258: D7.A J2.1
N18537260: D8.A J2.2
N18537262: D9.A J2.3
N18537272: D10.A J2.4
N18537274: D11.A J2.5
N18537276: D12.A J2.6
N18537278: D13.A J2.7
N18537280: D14.A J2.8
N18537282: D15.A J2.9
N18537284: D16.A J2.10
N18537409: C13.2 C14.2 C15.2 C16.2 C17.2 D28.A(ANODE) D29.A(ANODE) D30.A(ANODE) D31.A(ANODE) D32.A(ANODE) R30.1 R31.1 R32.1 R33.1 R34.1
N18537654: C12.2 D27.A(ANODE) R29.1
N18542223: D1.A J1.5
N18542225: D2.A J1.6
N18542227: D3.A J1.7
N18542237: D4.A J1.8
N18542239: D5.A J1.9
N18542241: D6.A J1.10
N18542365: C2.2 C3.2 C4.2 C5.2 C6.2 C7.2 D17.A(ANODE) D18.A(ANODE) D19.A(ANODE) D20.A(ANODE) D21.A(ANODE) D22.A(ANODE) R19.1 R20.1 R21.1 R22.1 R23.1 R24.1
N18547707: D34.A U3.4(OUT_P)
N18565427: Q1.1(GATE) R40.2
N18565563: LS1.1(A) Q1.3(DRAIN)
N18634606: D43.C(K) R52.2
N18634608: D54.C(K) R62.2
N18634610: D63.C(K) R72.2
N18634612: D73.C(K) R82.2
N18634614: D84.C(K) R87.2
N18634616: D93.C(K) R102.2
N18634618: D103.C(K) R112.2
N18634620: D114.C(K) R122.2
N18634622: D122.C(K) R130.2
N18634624: D131.C(K) R138.2
N18639403: D44.C(K) R53.2
N18639405: D53.C(K) R63.2
N18639407: D64.C(K) R73.2
N18639409: D74.C(K) R83.2
N18639411: D85.C(K) R93.2
N18639413: D94.C(K) R103.2
N18639415: D104.C(K) R113.2
N18639417: D115.C(K) R123.2
N18639419: D123.C(K) R131.2
N18639421: D132.C(K) R139.2
N18642150: D42.C(K) R50.2
N18642152: D52.C(K) R60.2
N18642154: D62.C(K) R70.2
N18642156: D72.C(K) R80.2
N18642158: D82.C(K) R90.2
N18642160: D92.C(K) R100.2
N18642162: D102.C(K) R110.2
N18642164: D113.C(K) R121.2
N18642166: D121.C(K) R129.2
N18642168: D130.C(K) R137.2
N18644969: D35.C(K) R38.2
N18644971: D37.C(K) R42.2
N18644973: D39.C(K) R44.2
N18644975: D47.C(K) R55.2
N18644977: D57.C(K) R65.2
N18644979: D67.C(K) R75.2
N18644981: D77.C(K) R85.2
N18644983: D87.C(K) R95.2
N18644985: D97.C(K) R105.2
N18644987: D107.C(K) R115.2
N18671779: D6.C(K) R8.2
N18671947: D5.C(K) R7.2
N18672127: D4.C(K) R6.2
N18672321: D3.C(K) R5.2
N18672528: D2.C(K) R4.2
N18672748: D1.C(K) R3.2
N18672983: D16.C(K) R18.2
N18673191: D15.C(K) R17.2
N18673413: D14.C(K) R16.2
N18673648: D13.C(K) R15.2
N18673896: D12.C(K) R14.2
N18674160: D11.C(K) R13.2
N18674398: D10.C(K) R12.2
N18675512: D9.C(K) R11.2
N18676637: D8.C(K) R10.2
N18677776: D7.C(K) R9.2
N18768788: R141.1 U1.71(IOREF)
N185630101: LS1.2(B) R35.1

Pads without a net: J3 2 3

## Text on the board
PAGE_OUTLINE: DIMENSIONS IN MM | B | PCB RevB | SDI-12_ULTRASONIC LEVEL SENSOR | 20170515
DIMENSION: SECONDARY SIDE LAYER4 (18Um) | CORE              (1600Um) | PRIMARY SIDE LAYER1 (18Um) | 10.ALL BOARDS MUST BE ELECTRICALLY TESTED | 6.100% CONTINUTY TESTING USING DATABASE NETLIST SHALL BE | 7.LOGO AND DATEMARK NEGATIVE IN SOLDER MASK | 8.BOW AND TWIST | 9.MINIMUM CONDUCTER WIDTH IS 0.2MM | 5.SILK SCREEN LEGEND WILL NOT TO BE APPLIED. | SHALL NOT EXCEED 0.7% OF LONGEST SIDE. | 4. | 3.SURFACE FINISH:  LEAD FREE HAL | 1.FABRICATE PER IPC-6012A CLASS2 | 2.MATERIAL | SOLDER MASK MATERIAL SHALL MEET ALL REQUIREMENTS OF | COPPER. | PERFORMED. | IPC-SM-840C AND SHALL BE GREEN IN COLOR AND APPLIED OVER BASE | MINIMUM SPACING IS 0.15MM. | NOTES:UNLESS OTHERWISE SPECIFIED. | COPPER AS PER STACKUP | DIELECTRIC:FR4 PER IPC-4101 | UL.RATING | 94-0 MINIMUM | 1.6MM+/-10%
User.6: FILM LAYER: | PART NO/CARD REF:   LEVEL SENSOR | DAY :       15/05/2017 | RevB
User.8: SILKSCREEN-TOP
User.9: SOLDER MASK SECONDARY
User.10: SOLDER MASK PRIMARY
User.11: PASTEMASK BOTTOM
User.12: PRIMARY SIDE PASTEMASK
User.13: FABRICATION LAYER
User.14: PRIMARY SIDE
User.15: LAYER2-UNUSED1
User.16: LAYER2-SIGNAL1
User.17: LAYER3-SIGNL2
User.18: LAYER5-UNUSED2
User.19: SECONDARY SIDE
User.20: ASSEMBLY PRIMARY SIDE
User.21: ASSEMBLY SECONDARY SIDE
User.28: FIGURE | SIZE | 0.3 | 1.0 | 1.2 | 4.5 | DRILL CHART: TOP to BOTTOM | ALL UNITS ARE IN MILLIMETERS | TOLERANCE | +0.0/-0.0 | +0.08/-0.08 | PLATED | NON-PLATED | QTY | 511 | 4 | 8
